# EAGLE board e-Tapperhandpiece12 (EAGLE 8.2.2)
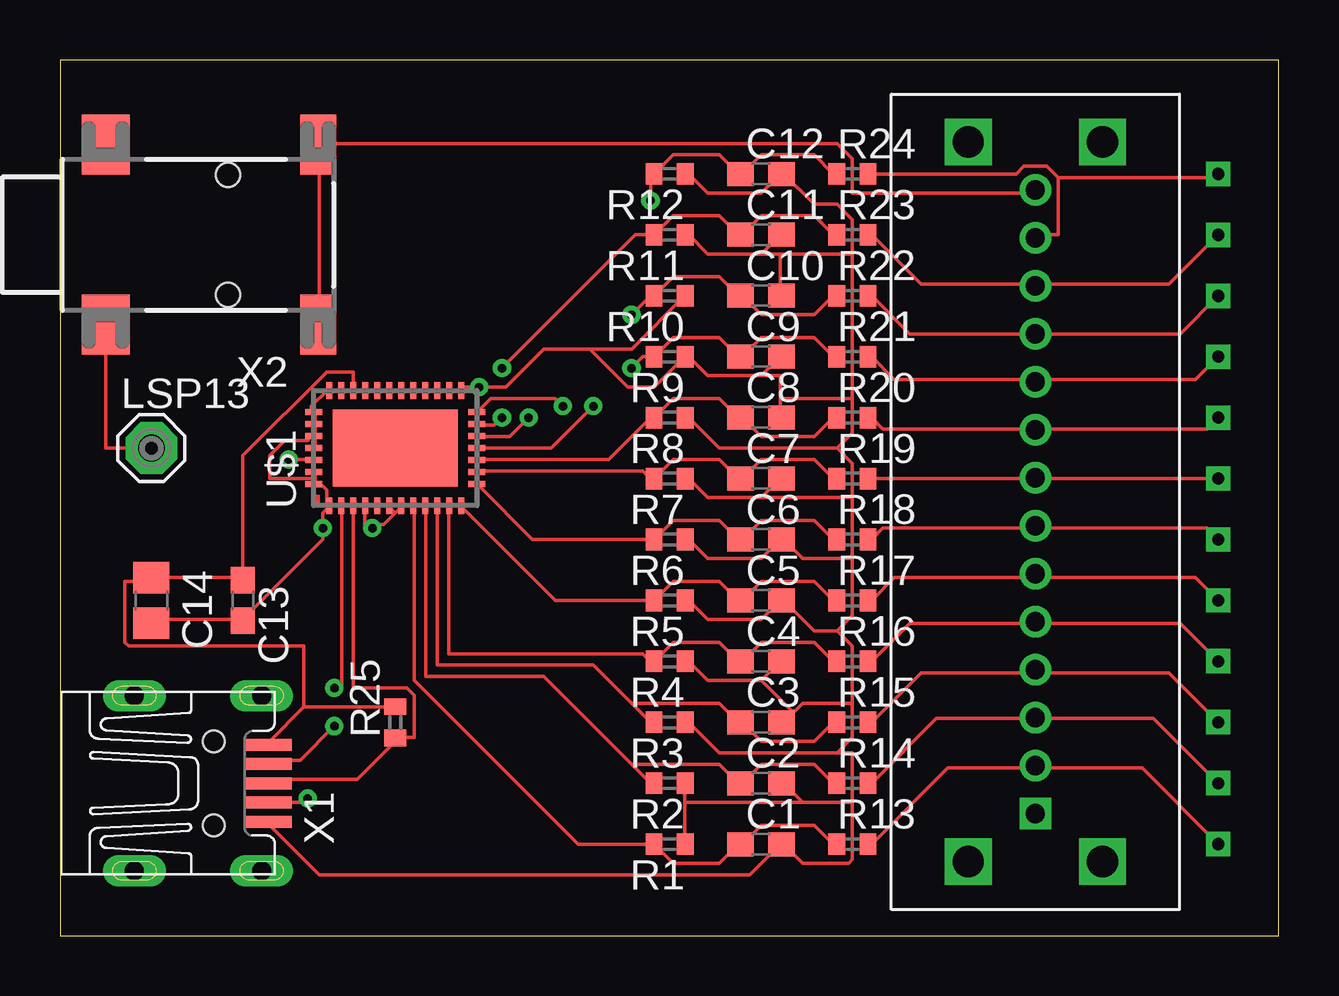
[diagram p0: board, top side]
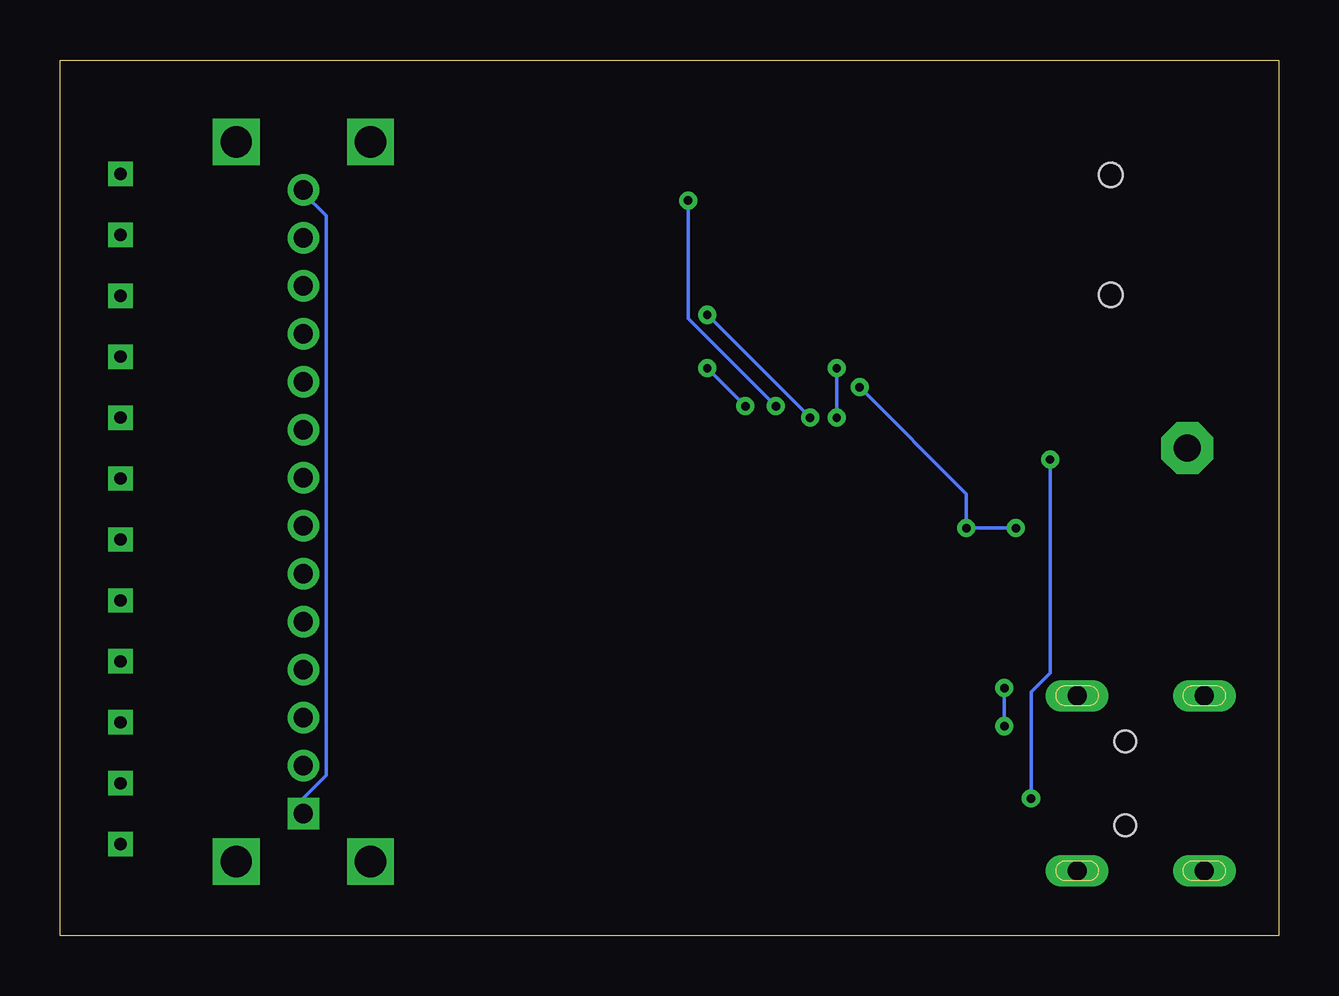
[diagram p1: board, bottom side, seen from below]

Size 50.78 x 36.5 mm. Coordinates in mm from the lower left corner, seen from the top.
Outline: 0,0 50.78,0 50.78,36.5 0,36.5 0,0
Copper layers (1*16): Top 0.035mm / dielectric 1.5mm / Bottom 0.035mm
Design rules "default": minimum track width 6mil, minimum drill 0.35mm, track to track 6mil, track to pad 6mil, pad to pad 6mil, via to via 6mil, smd to smd 6mil, copper to edge 40mil, drill to drill 6mil, minimum pad ring 10mil, minimum via ring 8mil, stop-mask expansion 4mil, vias tented up to drill 0mil, thermal gap 10mil
Net classes: 0 default: clearance 0.205 mm

## Footprints (pad centres in the part's own frame; a part is rotated, then mirrored left to right if it is on the bottom)
C0603 = smd 1.1 x 1: 1 -0.85,0; 2 0.85,0
C0805 = smd 1.3 x 1.5: 1 -0.95,0; 2 0.95,0
SE11 = drill 1.118 pad 2.159 octagon: MP 0,0
R0402 = smd 0.7 x 0.9: 1 -0.65,0; 2 0.65,0
ET1 = drill 0.508 square: P$1 0,0
QFN38-5X7 = smd 0.7 x 0.25: 1 -2.4,2.75; 2 -2.4,2.25; 3 -2.4,1.75; 4 -2.4,1.25; 5 -2.4,0.75; 6 -2.4,0.25; 7 -2.4,-0.25; 8 -2.4,-0.75; 9 -2.4,-1.25; 10 -2.4,-1.75; 11 -2.4,-2.25; 12 -2.4,-2.75; 20 2.4,-2.75; 21 2.4,-2.25; 22 2.4,-1.75; 23 2.4,-1.25; 24 2.4,-0.75; 25 2.4,-0.25; 26 2.4,0.25; 27 2.4,0.75; 28 2.4,1.25; 29 2.4,1.75; 30 2.4,2.25; 31 2.4,2.75 | smd 0.25 x 0.7: 13 -1.5,-3.4; 14 -1,-3.4; 15 -0.5,-3.4; 16 0,-3.4; 17 0.5,-3.4; 18 1,-3.4; 19 1.5,-3.4; 32 1.5,3.4; 33 1,3.4; 34 0.5,3.4; 35 0,3.4; 36 -0.5,3.4; 37 -1,3.4; 38 -1.5,3.4 | smd 3.2 x 5.2: EXP 0,0
SS112D01 = drill 0.8 square: P$1 6.35,3.81 | drill 0.8: P$2 6.35,5.81; P$3 6.35,7.81; P$4 6.35,9.81; P$5 6.35,11.81; P$6 6.35,13.81; P$7 6.35,15.81; P$8 6.35,17.81; P$9 6.35,19.81; P$10 6.35,21.81; P$11 6.35,23.81; P$12 6.35,25.81; P$13 6.35,27.81; P$14 6.35,29.81 | drill 1.3 square: P$15 9.15,31.81; P$16 3.55,31.81; P$17 9.15,1.81; P$18 3.55,1.81
UX60-MB-5S8 = smd 2 x 0.5: 1 8.65,1.6; 2 8.65,0.8; 3 8.65,0; 4 8.65,-0.8; 5 8.65,-1.6 | drill 0.8 long: M1 3.1,-3.65; M2 3.1,3.65; M3 8.4,3.65; M4 8.4,-3.65 | hole 0.9: 6.4,-1.75; 6.4,1.75
1503_02 = smd 2.5 x 1.5: 1 -3.75,-10.75; 3 3.75,-10.75 | smd 2.5 x 2: 2 -3.75,-1.9; 2@2 3.75,-1.9 | hole 1: -2.5,-7; 2.5,-7

## Placement (x,y rotation side)
C1  [C0603]  29.21,3.81 0 top
C2  [C0603]  29.21,6.35 0 top
C3  [C0603]  29.21,8.89 0 top
C4  [C0603]  29.21,11.43 0 top
C5  [C0603]  29.21,13.97 0 top
C6  [C0603]  29.21,16.51 0 top
C7  [C0603]  29.21,19.05 0 top
C8  [C0603]  29.21,21.59 0 top
C9  [C0603]  29.21,24.13 0 top
C10  [C0603]  29.21,26.67 0 top
C11  [C0603]  29.21,29.21 0 top
C12  [C0603]  29.21,31.75 0 top
C13  0.1 uF  [C0603]  7.62,13.97 270 top
C14  10 uF  [C0805]  3.81,13.97 270 top
LSP13  SE11  [SE11]  3.81,20.32 0 top
R1  [R0402]  25.4,3.81 180 top
R2  [R0402]  25.4,6.35 180 top
R3  [R0402]  25.4,8.89 180 top
R4  [R0402]  25.4,11.43 180 top
R5  [R0402]  25.4,13.97 180 top
R6  [R0402]  25.4,16.51 180 top
R7  [R0402]  25.4,19.05 180 top
R8  [R0402]  25.4,21.59 180 top
R9  [R0402]  25.4,24.13 180 top
R10  [R0402]  25.4,26.67 180 top
R11  [R0402]  25.4,29.21 180 top
R12  [R0402]  25.4,31.75 180 top
R13  [R0402]  33.02,3.81 0 top
R14  [R0402]  33.02,6.35 0 top
R15  [R0402]  33.02,8.89 0 top
R16  [R0402]  33.02,11.43 0 top
R17  [R0402]  33.02,13.97 0 top
R18  [R0402]  33.02,16.51 0 top
R19  [R0402]  33.02,19.05 0 top
R20  [R0402]  33.02,21.59 0 top
R21  [R0402]  33.02,24.13 0 top
R22  [R0402]  33.02,26.67 0 top
R23  [R0402]  33.02,29.21 0 top
R24  [R0402]  33.02,31.75 0 top
R25  10 K  [R0402]  13.97,8.89 90 top
TSP1  ET1  [ET1]  48.26,3.81 0 top
TSP2  ET1  [ET1]  48.26,6.35 0 top
TSP3  ET1  [ET1]  48.26,8.89 0 top
TSP4  ET1  [ET1]  48.26,11.43 0 top
TSP5  ET1  [ET1]  48.26,13.97 0 top
TSP6  ET1  [ET1]  48.26,16.51 0 top
TSP7  ET1  [ET1]  48.26,19.05 0 top
TSP8  ET1  [ET1]  48.26,21.59 0 top
TSP9  ET1  [ET1]  48.26,24.13 0 top
TSP10  ET1  [ET1]  48.26,26.67 0 top
TSP11  ET1  [ET1]  48.26,29.21 0 top
TSP12  ET1  [ET1]  48.26,31.75 0 top
U$1  LTC2497  [QFN38-5X7]  13.97,20.32 90 top
U$2  SS112D01  [SS112D01]  34.29,1.27 0 top
X1  MINI-USB-UX60-MB-5S8  [UX60-MB-5S8]  0,6.35 0 top
X2  1503_02  [1503_02]  0,29.21 90 top

## Library data of the parts
C1-C14 = rcl
LSP13 = solpad
R1-R25 = resistor
TSP1-TSP12 = ET1
U$1 = LTC2497
U$2 = SS112D01
X1 = con-hirose; OC_FARNELL: unknown; OC_NEWARK: unknown
X2 = con-lumberg; OC_FARNELL: 1216979; OC_NEWARK: unknown

## Nets
N$1: C9.1 R9.2 R21.1 U$1.16
N$2: U$1.26 U$1.27
N$3: U$1.24 U$1.25
N$5: C12.1 R12.2 R24.1 U$1.19
N$7: C4.1 R4.2 R16.1 U$1.11
N$8: C10.1 R10.2 R22.1 U$1.17
N$9: C8.1 R8.2 R20.1 U$1.15
N$18: C5.1 R5.2 R17.1 U$1.12
N$19: C6.1 R6.2 R18.1 U$1.13
N$20: C7.1 R7.2 R19.1 U$1.14
N$22: C3.1 R3.2 R15.1 U$1.10
N$23: C2.1 R2.2 R14.1 U$1.9
N$24: C11.1 R11.2 R23.1 U$1.18
N$25: C1.1 R1.2 R13.1 U$1.8
TP1: R13.2 TSP1.P$1 U$2.P$2
TP2: R14.2 TSP2.P$1 U$2.P$3
TP3: R15.2 TSP3.P$1 U$2.P$4
TP4: R16.2 TSP4.P$1 U$2.P$5
TP5: R17.2 TSP5.P$1 U$2.P$6
TP6: R18.2 TSP6.P$1 U$2.P$7
TP7: R19.2 TSP7.P$1 U$2.P$8
TP8: R20.2 TSP8.P$1 U$2.P$9
TP9: R21.2 TSP9.P$1 U$2.P$10
TP10: R22.2 TSP10.P$1 U$2.P$11
TP11: R23.2 TSP11.P$1 U$2.P$12
TP12: R24.2 TSP12.P$1 U$2.P$13
TS+: LSP13.MP X2.2
TS-: U$2.P$1 U$2.P$14 X2.1 X2.3
TSCA: U$1.36 X1.4
TSCL: U$1.2 X1.2
TSDA: R25.1 U$1.3 X1.3
TSGND: C1.2 C2.2 C3.2 C4.2 C5.2 C6.2 C7.2 C8.2 C9.2 C10.2 C11.2 C12.2 C13.2 C14.2 R1.1 R2.1 R3.1 R4.1 R5.1 R6.1 R7.1 R8.1 R9.1 R10.1 R11.1 R12.1 U$1.1 U$1.4 U$1.6 U$1.7 U$1.20 U$1.21 U$1.22 U$1.23 U$1.30 U$1.31 U$1.32 U$1.33 U$1.34 U$1.35 U$1.37 U$1.38 X1.5
VCC: C13.1 C14.1 R25.2 U$1.28 U$1.29 X1.1

## Tracks (layer width: path | path; a pad name or v marks a point on that pad's centre or on a via)
N$1  (via drill 0.35)
  Top 0.152: R21.1 32.23,24.13 31.43,24.92 29.21,24.92 28.42,24.13 C9.1 28.26,24.13 27.46,24.92 25.56,24.92 24.77,24.13 R9.2 24.29,24.13 v23.81,23.65 | U$1.16 20.48,20.32 v22.23,22.07
  Bottom 0.152: v23.81,23.65 v22.23,22.07
N$2
  Top 0.152: U$1.27 13.34,22.7 13.65,22.7 U$1.26
N$3
  Top 0.152: U$1.25 14.29,22.7 14.61,22.7 U$1.24
N$5  (via drill 0.35)
  Top 0.152: R24.1 32.23,31.75 31.43,32.54 29.21,32.54 28.42,31.75 C12.1 28.26,31.75 27.46,32.54 25.56,32.54 24.77,31.75 R12.2 24.61,31.75 v24.61,30.64 | v20.95,22.07 20.64,22.38 17.94,22.38 17.46,21.91 U$1.19
  Bottom 0.152: v20.95,22.07 24.61,25.72 v24.61,30.64
N$7
  Top 0.152: R16.1 32.23,11.43 31.43,12.22 29.21,12.22 28.42,11.43 C4.1 28.26,11.43 27.46,12.22 25.56,12.22 24.77,11.43 R4.2 24.61,11.43 24.29,11.75 16.19,11.75 16.19,17.78 U$1.11
N$8  (via drill 0.35)
  Top 0.152: R22.1 32.23,26.67 31.43,25.88 29.21,25.88 28.42,26.67 C10.1 28.26,26.67 27.46,27.46 25.56,27.46 24.77,26.67 R10.2 24.61,26.67 v23.81,25.88 | v19.53,21.59 18.73,20.8 17.46,20.8 U$1.17
  Bottom 0.152: v23.81,25.88 v19.53,21.59
N$9
  Top 0.152: R20.1 32.23,21.59 31.43,20.8 29.21,20.8 28.42,21.59 C8.1 28.26,21.59 27.46,22.38 25.56,22.38 24.77,21.59 R8.2 24.61,21.59 22.86,19.84 17.46,19.84 U$1.15
N$18
  Top 0.152: R17.1 32.23,13.97 31.43,14.76 29.21,14.76 28.42,13.97 C5.1 28.26,13.97 27.46,14.76 25.56,14.76 24.77,13.97 R5.2 20.64,13.97 16.83,17.78 U$1.12
N$19
  Top 0.152: R18.1 32.23,16.51 31.43,17.3 29.21,17.3 28.42,16.51 C6.1 28.26,16.51 27.46,17.3 25.56,17.3 24.77,16.51 R6.2 19.68,16.51 17.46,18.73 U$1.13
N$20
  Top 0.152: R19.1 32.23,19.05 31.43,19.84 29.21,19.84 28.42,19.05 C7.1 28.26,19.05 27.46,19.84 25.56,19.84 24.77,19.05 R7.2 24.61,19.05 24.29,19.37 17.46,19.37 U$1.14
N$22
  Top 0.152: R15.1 32.23,8.89 31.43,8.1 29.21,8.1 28.42,8.89 C3.1 28.26,8.89 27.46,9.68 23.81,9.68 | 23.81,9.68 24.61,8.89 R3.2 | 23.81,9.68 22.23,11.27 15.72,11.27 15.72,17.78 U$1.10
N$23
  Top 0.152: R14.1 32.23,6.35 31.43,7.14 29.21,7.14 28.42,6.35 C2.1 28.26,6.35 27.46,7.14 23.81,7.14 | 23.81,7.14 24.61,6.35 R2.2 | 23.81,7.14 20.16,10.79 15.24,10.79 15.24,17.78 U$1.9
N$24  (via drill 0.35)
  Top 0.152: R23.1 32.23,29.21 31.43,30 29.21,30 28.42,29.21 C11.1 28.26,29.21 27.46,30 25.56,30 24.77,29.21 R11.2 23.97,29.21 v18.41,23.65 | v18.41,21.59 18.1,21.27 17.46,21.27 U$1.18
  Bottom 0.152: v18.41,23.65 v18.41,21.59
N$25
  Top 0.152: R13.1 32.23,3.81 31.43,4.6 29.21,4.6 28.42,3.81 C1.1 28.26,3.81 27.46,3.02 25.56,3.02 24.77,3.81 R1.2 21.59,3.81 14.76,10.64 14.76,17.78 U$1.8
TP1
  Top 0.152: 40.64,6.99 36.99,6.99 33.81,3.81 R13.2 | TSP1.P$1 45.09,6.99 40.64,6.99 | 40.64,6.99 U$2.P$2
TP2
  Top 0.152: 40.64,9.05 36.51,9.05 33.81,6.35 R14.2 | TSP2.P$1 45.56,9.05 40.64,9.05 | 40.64,9.05 U$2.P$3
TP3
  Top 0.152: 40.64,10.95 35.88,10.95 33.81,8.89 R15.2 | TSP3.P$1 46.2,10.95 40.64,10.95 | 40.64,10.95 U$2.P$4
TP4
  Top 0.152: 40.64,13.02 35.4,13.02 33.81,11.43 R16.2 | TSP4.P$1 46.67,13.02 40.64,13.02 | 40.64,13.02 U$2.P$5
TP5
  Top 0.152: 40.64,14.92 34.77,14.92 33.81,13.97 R17.2 | TSP5.P$1 47.31,14.92 40.64,14.92 | 40.64,14.92 U$2.P$6
TP6
  Top 0.152: 40.64,16.99 34.29,16.99 33.81,16.51 R18.2 | TSP6.P$1 47.78,16.99 40.64,16.99 | 40.64,16.99 U$2.P$7
TP7
  Top 0.152: 40.64,19.05 R19.2 | 40.64,19.05 TSP7.P$1 | 40.64,19.05 U$2.P$8
TP8
  Top 0.152: 40.64,21.11 34.29,21.11 33.81,21.59 R20.2 | TSP8.P$1 47.78,21.11 40.64,21.11 | 40.64,21.11 U$2.P$9
TP9
  Top 0.152: 40.64,23.18 34.77,23.18 33.81,24.13 R21.2 | TSP9.P$1 47.31,23.18 40.64,23.18 | 40.64,23.18 U$2.P$10
TP10
  Top 0.152: U$2.P$11 35.4,25.08 33.81,26.67 R22.2 | TSP10.P$1 46.67,25.08 U$2.P$11 | U$2.P$11
TP11
  Top 0.152: 40.64,27.15 35.88,27.15 33.81,29.21 R23.2 | TSP11.P$1 46.2,27.15 40.64,27.15 | 40.64,27.15 U$2.P$12
TP12
  Top 0.152: R24.2 39.85,31.75 40.16,32.07 41.12,32.07 41.59,31.59 | 41.59,31.59 41.59,29.21 40.64,29.21 U$2.P$13 | TSP12.P$1 48.1,31.59 41.59,31.59
TS+
  Top 0.152: LSP13.MP 1.91,20.32 1.91,25.4 X2.2
TS-
  Top 0.152: X2.1 10.79,25.56 10.79,32.86 X2.3 10.79,33.02 32.38,33.02 33.02,32.38 33.02,30.96 40.64,30.96 U$2.P$14
  Bottom 0.152: U$2.P$1 40.64,5.71 39.69,6.67 39.69,30 40.64,30.96 U$2.P$14
TSCA  (via drill 0.35)
  Top 0.152: v9.53,19.84 10.48,19.84 U$1.36 | v10.32,5.71 10.16,5.56 8.73,5.56 X1.4
  Bottom 0.152: v9.53,19.84 9.53,10.95 10.32,10.16 v10.32,5.71
TSCL  (via drill 0.35)
  Top 0.152: v11.43,10.32 11.75,10.32 11.75,17.78 U$1.2 | v11.43,8.73 10,7.3 8.73,7.3 X1.2
  Bottom 0.152: v11.43,8.73 v11.43,10.32
TSDA
  Top 0.152: U$1.3 12.22,17.78 12.22,10.32 14.45,10.32 14.76,10 14.76,8.26 13.97,8.26 R25.1 13.97,8.1 12.38,6.51 8.89,6.51 8.73,6.35 X1.3
TSGND  (via drill 0.35)
  Top 0.152: R5.1 26.19,13.97 26.99,13.18 29.21,13.18 30,13.97 C5.2 30.16,13.97 31.43,12.7 32.38,12.7 | 29.21,10.64 26.99,10.64 26.19,11.43 R4.1 | 29.21,10.64 30,11.43 C4.2 | 26.04,5.56 26.04,6.35 R2.1 | 26.04,5.56 26.04,3.81 R1.1 | 32.38,7.62 27.46,7.62 26.19,8.89 R3.1 | 32.38,7.62 33.02,8.26 33.02,9.68 | 33.02,9.68 30.96,9.68 30.64,9.37 | 30.64,9.37 30.16,8.89 C3.2 | 33.02,5.56 33.02,7.62 32.38,7.62 | 33.02,5.56 33.02,3.17 32.86,3.02 30.96,3.02 30.16,3.81 C1.2 30,3.81 28.73,2.54 10.79,2.54 8.73,4.6 X1.5 | 30.96,5.56 30.16,6.35 C2.2 | 33.02,5.56 30.96,5.56 | 30.96,5.56 26.04,5.56 | 29.21,10.64 30.48,9.37 30.64,9.37 | 32.38,12.7 33.02,12.06 33.02,9.68 | 7.62,13.18 3.81,13.18 C14.2 | U$1.30 11.75,22.7 11.27,22.7 U$1.31 11.11,22.7 10.48,22.07 10.48,21.91 U$1.32 10.64,21.75 10.64,21.43 U$1.33 10.64,21.27 10.64,20.8 | 10.64,20.8 10.64,20.32 U$1.35 | 10.64,20.8 U$1.34 10.48,20.8 10.32,20.64 9.37,20.64 8.73,20 8.73,19.05 10.64,19.05 | 13.02,17.14 13.49,17.14 13.97,17.62 | 13.02,17.14 12.7,17.14 12.7,17.78 U$1.4 | 13.97,17.62 14.13,17.78 U$1.7 | 13.97,17.62 13.81,17.78 U$1.6 | 10.64,19.05 10.64,19.21 U$1.37 | 10.64,19.05 10.64,18.89 U$1.38 10.64,18.73 10.95,18.73 11.11,18.57 11.11,17.94 U$1.1 11.11,17.78 10.95,17.62 v10.95,16.99 10.95,16.51 7.62,13.18 | v13.02,16.99 13.02,17.14 | 7.62,13.18 C13.2 | R12.1 26.19,31.75 26.99,30.96 29.21,30.96 30,31.75 C12.2 30.16,31.75 31.43,30.48 32.38,30.48 33.02,29.84 33.02,28.42 | 29.21,28.42 26.99,28.42 26.19,29.21 R11.1 | 29.21,28.42 30,29.21 C11.2 | 30,28.42 30,26.67 C10.2 | 29.21,28.42 30,28.42 | 30,28.42 33.02,28.42 | R6.1 26.19,16.51 26.99,15.72 29.21,15.72 30,16.51 C6.2 30.16,16.51 30.96,15.72 32.86,15.72
  Top 0.152: 29.21,18.26 26.99,18.26 26.19,19.05 R7.1 | 29.21,18.26 30,19.05 C7.2 | 32.38,20.32 27.46,20.32 26.19,21.59 R8.1 | 32.38,20.32 33.02,19.68 33.02,18.26 | 29.21,18.26 33.02,18.26 | 32.86,15.72 33.02,15.88 33.02,18.26 | 29.21,23.34 26.99,23.34 26.19,24.13 R9.1 26.04,24.13 24.77,22.86 23.65,22.86 22.07,24.45 | 29.21,23.34 30,24.13 C9.2 | 30,22.38 30,23.34 29.21,23.34 | 30,22.38 30,21.59 C8.2 | 15.72,22.7 15.24,22.7 U$1.23 | 15.72,22.7 16.19,22.7 | 15.72,22.7 U$1.22 | 16.19,22.7 16.67,22.7 U$1.20 16.83,22.86 v17.46,22.86 18.57,22.86 20.16,24.45 22.07,24.45 | 16.19,22.7 U$1.21 | 22.07,24.45 23.81,24.45 26.04,26.67 R10.1 | 32.38,20.32 33.02,20.95 33.02,22.38 | 30,22.38 33.02,22.38 | 33.02,22.38 33.02,28.42 | 32.38,12.7 33.02,13.34 33.02,15.72 32.86,15.72
  Bottom 0.152: v10.95,16.99 v13.02,16.99 13.02,18.41 v17.46,22.86
VCC
  Top 0.152: 10.16,9.53 13.97,9.53 R25.2 | 10.16,9.53 8.73,8.1 X1.1 | U$1.28 12.7,22.7 12.22,22.7 U$1.29 12.22,22.86 12.22,23.5 11.11,23.5 7.62,20 7.62,14.92 | 7.62,14.92 C14.1 3.81,14.76 2.7,14.76 2.7,12.22 2.86,12.06 10.16,12.06 10.16,9.53 | 7.62,14.92 C13.1